# Altium PCB LoRaBaseStation.PcbDoc
Units mm, origin at the board's own origin, x right, y up, seen from the top; angles counter-clockwise.
Board outline 68.45 x 47.24 mm, 2 copper layers (Top Layer, Bottom Layer); 11 components, 5 nets, 93 pads, 24 vias.
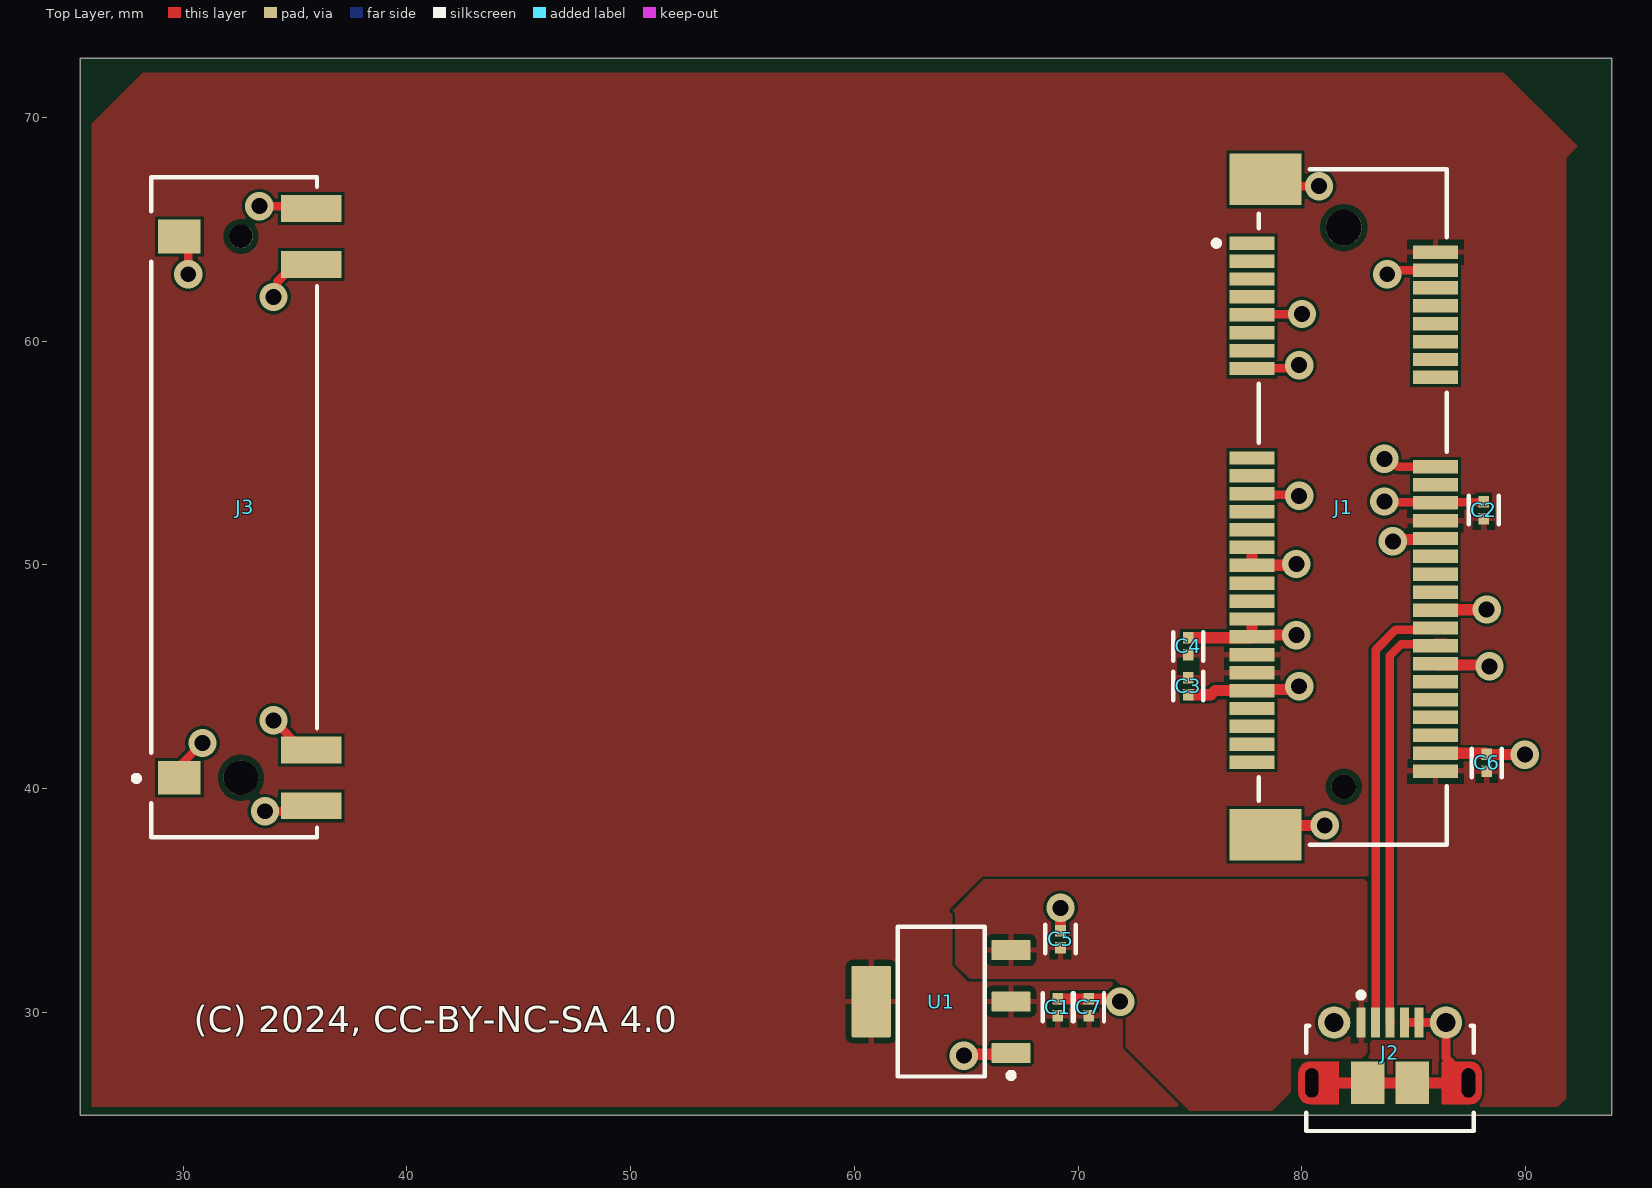
[diagram p0: Top Layer view]
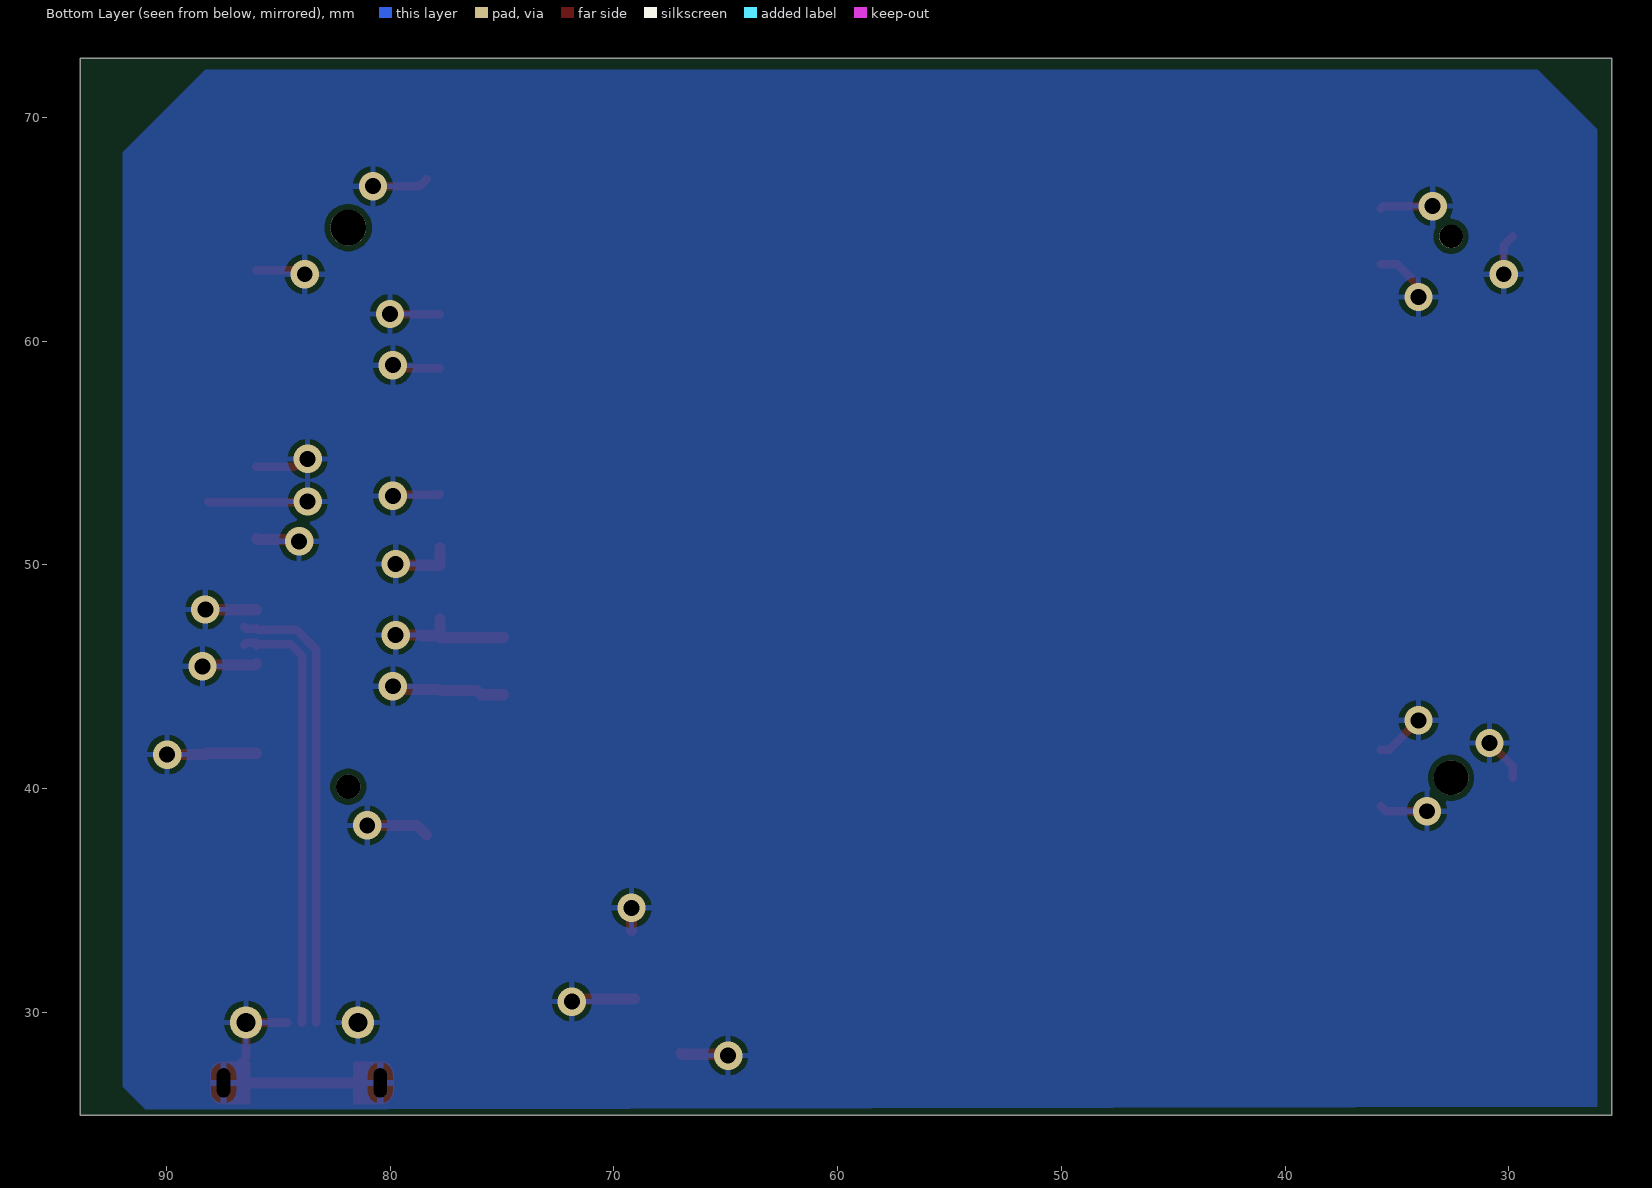
[diagram p1: Bottom Layer view, seen from below]
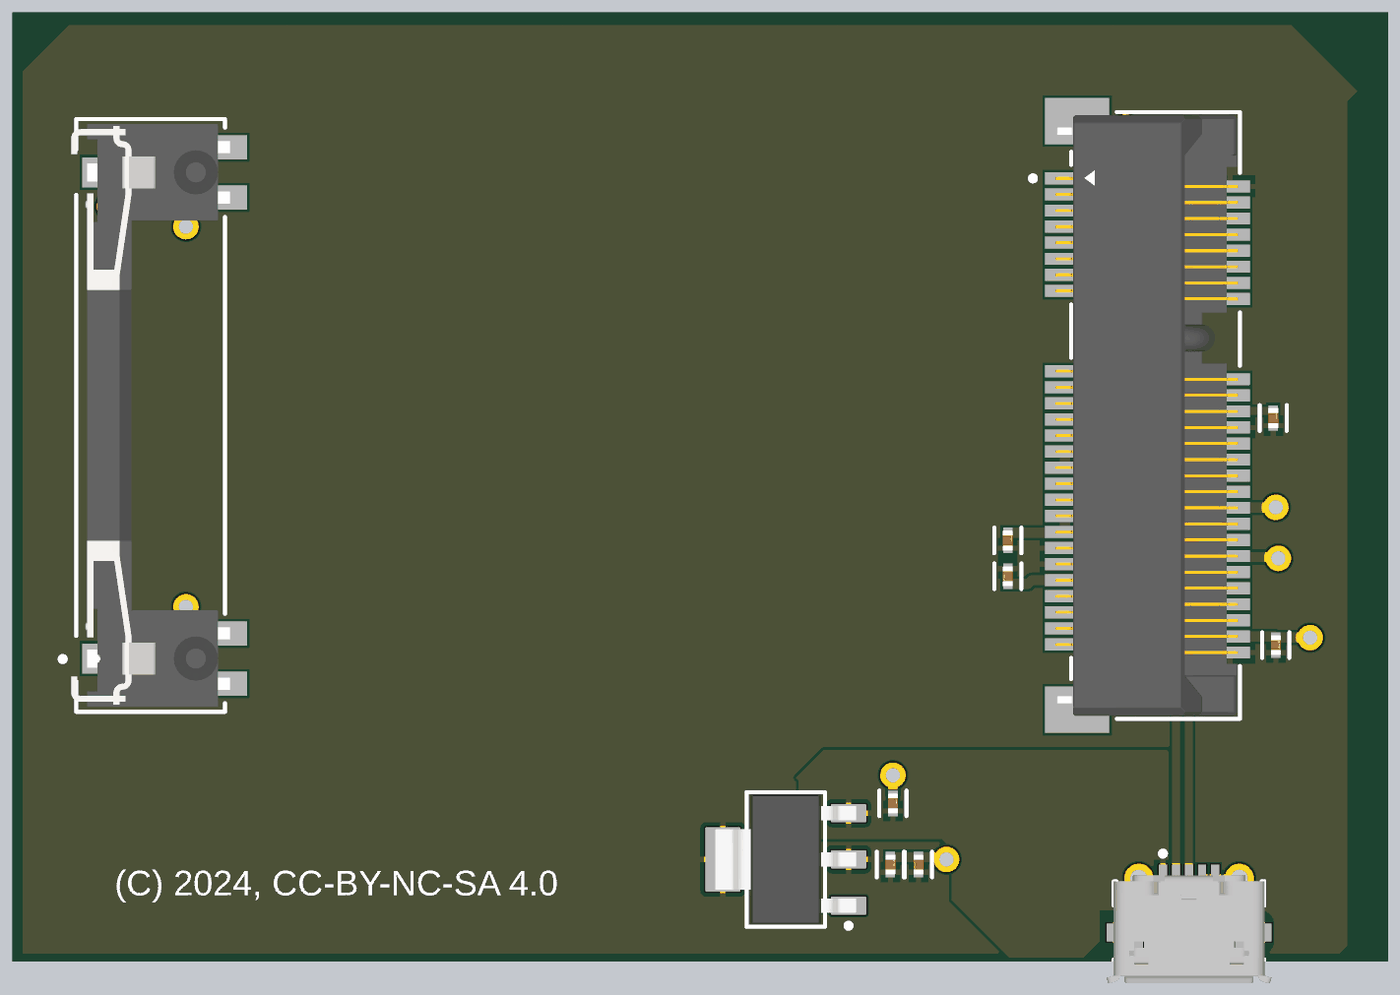
[diagram p2: 3D render of the assembled board from above, using the file's embedded part models]

## Layer stack, top to bottom
Top Solder: solder mask 0.0102, Solder Resist, Dk 3.5
Top Layer: signal copper 0.0356
Dielectric 1: dielectric 0.32, FR-4, Dk 4.8
Bottom Layer: signal copper 0.0356
Bottom Solder: solder mask 0.0102, Solder Resist, Dk 3.5

## Board outline
25.4,25.4 93.853,25.4 93.853,72.644 25.4,72.644

## Design rules (kind name [scope] priority, off if disabled: settings)
BoardOutlineClearance [All] p1 off: gap=0.2 ignorepadtopadclearanceinfootprint=FALSE
Clearance [All] p1: gap=0.127 ignorepadtopadclearanceinfootprint=FALSE except(0.25: Arc-Hole Track-Hole SMDPad-Hole THPad-Hole Via-Hole Fill-Hole Poly-Hole Region-Hole Text-Hole)
DiffPairsRouting [All] p1: maxlimit=0.254 minlimit=0.254 mostfreqgap=0.254 toplayer_minwidth=0.381 toplayer_maxwidth=0.381 toplayer_prefwidth=0.381 bottomlayer_minwidth=0.381 bottomlayer_maxwidth=0.381 bottomlayer_prefwidth=0.381 maxuncoupledlength=12.7
HoleSize [All] p1: absolutevalues=TRUE maxlimit=6.3 minlimit=0.3 maxpercent=80.000 minpercent=20.000
HoleToHoleClearance [All] p1: gap=0.25 allowstackedmicrovias=FALSE
MinimumAnnularRing [All] p1 off: minimumring=0.076
MinimumSolderMaskSliver [All] p1: minsoldermaskwidth=0
PolygonConnect [All] p1: connectstyle=Relief reliefconductorwidth=0.254 reliefentries=4 polygonreliefangle="90 Angle" airgapwidth=0.254
RoutingVias [All] p1: holewidth=0.711 width=1.27 viastyle="Through Hole" minholewidth=0.711 minwidth=1.27 maxholewidth=0.711 maxwidth=1.27
SilkToSilkClearance [All] p1: silktosilkclearance=0
SilkToSolderMaskClearance [IsPad] p1: minsilkscreentomaskgap=0.127 clearancetoexposedcopper=TRUE
SolderMaskExpansion [All] p1: expansion=0.075 istentingtop=FALSE
Width [All] p1: maxlimit=25.4 minlimit=0.127 preferedwidth=0.127 minimp=50.000000 maximp=50.000000 favimp=50.000000
24 further rules are at their usual default settings.

## Classes and differential pairs
differential pair D: +D_P -D_N

## Components (designator, comment, footprint, x,y, rotation, side; value= is the part's Value field where it differs from the comment)
C1 "GRM155R71E104KE14J" FP-GRM155-0_05-IPC_C 69.088,30.226 r90 top
C2 "GRM155R71E104KE14J" FP-GRM155-0_05-IPC_C 88.138,52.451 r90 top
C3 "GRM155R71E104KE14J" FP-GRM155-0_05-IPC_C 74.93,44.577 r270 top
C4 "GRM155R71E104KE14J" FP-GRM155-0_05-IPC_C 74.93,46.355 r90 top
C5 "CL05A105KP5NNNC" FP-CL511-IPC_C 69.215,33.272 r90 top
C6 "CL05A105KP5NNNC" FP-CL511-IPC_C 88.265,41.148 r90 top
C7 "GRM155R71E104KE14J" FP-GRM155-0_05-IPC_C 70.485,30.226 r270 top
J1 "1775862-2" FP-1775862-2-MFG 82.279,52.58 r270 top
J2 "105017-0001" USB-MICRO-B_V 83.947,28.194 r0 top
J3 "MM60-EZH059-B5-R650" FP-MM60-EZH059-B5-R650-MFG 32.279,52.58 r90 top
U1 "TLV1117LV33DCYR" DCY0004A_N 63.881,30.48 r180 top

## Footprints (in the part's own frame and the unit in brackets; to place one, negate y for a bottom-side part, rotate by r counter-clockwise, add the part's x,y. Pads: shape width x height; smd on the part's side, far side on the other; paste and mask are expansions set on the pad)
DCY0004A_N [mm] "SOT223, 4-Leads, Body 6.7x3.7mm, Pitch 2.3mm, IPC Medium Density"
  rrect11% 1.75x0.9 smd: 1(-3.125,2.3) 2(-3.125,0) 3(-3.125,-2.3)
  rrect6% 1.75x3.2 smd: 4(3.125,0)
  silkscreen extent -3.25,-3.35 1.95,3.42, body extent -3.5,-3.25 3.5,3.25, height 1.62
FP-1775862-2-MFG [mm]
  rect 0.6x2 smd paste+0 mask+0: 1(-11.8,-4.5) 2(-11.4,3.7) 3(-11,-4.5) 4(-10.6,3.7) 5(-10.2,-4.5) 6(-9.8,3.7) 7(-9.4,-4.5) 8(-9,3.7) 9(-8.6,-4.5) 10(-8.2,3.7) 11(-7.8,-4.5) 12(-7.4,3.7) 13(-7,-4.5) 14(-6.6,3.7) 15(-6.2,-4.5) 16(-5.8,3.7) 17(-2.2,-4.5) 18(-1.8,3.7) 19(-1.4,-4.5) 20(-1,3.7) 21(-0.6,-4.5) 22(-0.2,3.7) 23(0.2,-4.5) 24(0.6,3.7) 25(1,-4.5) 26(1.4,3.7) 27(1.8,-4.5) 28(2.2,3.7) 29(2.6,-4.5) 30(3,3.7) 31(3.4,-4.5) 32(3.8,3.7) 33(4.2,-4.5) 34(4.6,3.7) 35(5,-4.5) 36(5.4,3.7) 37(5.8,-4.5) 38(6.2,3.7) 39(6.6,-4.5) 40(7,3.7) 41(7.4,-4.5) 42(7.8,3.7) 43(8.2,-4.5) 44(8.6,3.7) 45(9,-4.5) 46(9.4,3.7) 47(9.8,-4.5) 48(10.2,3.7) 49(10.6,-4.5) 50(11,3.7) 51(11.4,-4.5) 52(11.8,3.7)
  rect 2.3x3.2 smd paste+0 mask+0: 53(-14.65,-3.9) 54(14.65,-3.9)
  round 1.6 hole 1.6 unplated paste-2539.97 mask+0: ""(-12.5,-0.4)
  round 1.1 hole 1.1 unplated paste-2539.97 mask+0: ""(12.5,-0.4)
  silkscreen extent -15.1,-6.22 15.1,4.2, body extent -15.9,-5.6 15.9,4.8, height 0.25
FP-CL511-IPC_C [mm]
  rect 0.515x0.472 smd paste+0 mask+0: 1(-0.379,0) 2(0.379,0)
  silkscreen extent -0.64,-0.67 0.64,0.67, body extent -0.74,-0.38 0.74,0.38, height 0.25
FP-GRM155-0_05-IPC_C [mm]
  rect 0.515x0.472 smd paste+0 mask+0: 1(-0.379,0) 2(0.379,0)
  silkscreen extent -0.64,-0.67 0.64,0.67, body extent -0.74,-0.38 0.74,0.38, height 0.25
FP-MM60-EZH059-B5-R650-MFG [mm]
  rect 1.5x1.9 smd paste+0 mask+0: 1(-12.1,2.45) 2(12.1,2.45)
  rect 1.2x2.7 smd paste+0 mask+0: 3(-13.35,-3.45) 4(-10.85,-3.45) 5(10.85,-3.45) 6(13.35,-3.45)
  round 1.55 hole 1.55 unplated paste-2539.97 mask+0: ""(-12.1,-0.3)
  round 1.05 hole 1.05 unplated paste-2539.97 mask+0: ""(12.1,-0.3)
  silkscreen extent -14.75,-3.7 14.75,4.5, body extent -14.85,-4.9 14.85,3.8, height 0.25
USB-MICRO-B_V [mm] "USB, MICRO B, Body 7.491x4.695 mm, Pitch 0.65 mm"
  rect 0.4x1.35 smd: 1(-1.3,1.35) 2(-0.65,1.35) 3(0,1.35) 4(0.65,1.35) 5(1.3,1.35)
  round 1.45 hole 0.85: 6(-2.5,1.35) 7(2.5,1.35)
  rrect50% 0x0 hole 0.6 slot 1.3 at 90 deg: 8(-3.5,-1.35) 11(3.5,-1.35)
  rect 1.5x1.9 smd: 9(-1,-1.35) 10(1,-1.35)
  Top Layer circle w0.5: c-3.6,-1.8 r0.25
  Top Layer circle w0.5: c-3.6,-0.9 r0.25
  Top Layer circle w0.5: c3.6,-1.8 r0.25
  Top Layer circle w0.5: c3.6,-0.9 r0.25
  Top Layer region: -3.6,-1.8 -3.6,-0.9 -4.1,-0.9 -4.1,-1.8
  Top Layer region: 3.6,-0.9 3.6,-1.8 4.1,-1.8 4.1,-0.9
  Top Layer region: 2.3,-0.4 2.3,-2.3 3.6,-2.3 3.6,-0.4
  Top Layer region: -2.3,-2.3 -2.3,-0.4 -3.6,-0.4 -3.6,-2.3
  silkscreen extent -3.75,-3.5 3.75,2.7, body extent -4.1,-3.9 4.1,1.5, height 2.67

## Part data
C1 C2 C3 C4 C7: library part CMP-06035-003995-1, "Chip Multilayer Ceramic Capacitors for General Purpose, 0402, 0.10uF, X7R, 15%, 10%, 25V", Capacitance=100nF, Case Code (Imperial)=0402, Case Code (Metric)=1005, Dielectric=X7R, Max Operating Temperature=125°C, Min Operating Temperature=-55°C, Package Quantity=50000, Resistor Type=Ceramic, Tolerance=10%, Voltage Rating=25V, Case/Package=0402, Height=0.5mm, Length=0.039inch, Mount="Surface Mount", Packaging="Tape and Reel", Termination=SMD/SMT, Thickness=0.022inch, Voltage Rating (DC)=25V, Weight=0.000212oz, Width=0.5mm
C5 C6: library part CMP-13271-001936-1, "Cap Ceramic 1uF 10V X5R ±10% SMD 0402 +85°C Paper T/R", Capacitance=1uF, Case Code (Imperial)=0402, Case Code (Metric)=1005, Dielectric=X5R, Max Operating Temperature=85°C, Min Operating Temperature=-55°C, Package Quantity=1, Tolerance=10%, Voltage Rating=10V, Case/Package=0402, Contact Plating=Tin, Depth=0.5mm, Height=0.5mm, Length=1mm, Material=Ceramic, Mount="Surface Mount", Packaging="Tape and Reel", Radiation Hardening=No, Thickness=0.022inch, Width=0.02inch
J1: library part CMP-03365-000003-1, "CONN PCI EXP MINI FEMALE 52POS", Flammability Rating="UL94 V-0", High Temperature Housing=Yes, Housing Color=Black, Package Quantity=550, Connector Type=Receptacle, Contact Material="Copper Alloy", Contact Plating=Gold, ELV=Compliant, Housing Material=Thermoplastic, Lead Free="Contains Lead", Mount="Surface Mount", Number of Contacts=52, Number of Positions=52, Number of Rows=2, Orientation="Right Angle", Packaging="Tape and Reel", PCB Mount Retention=Without, PCB Mounting Orientation=Horizontal, Pitch=0.8mm, Radiation Hardening=No, RoHS Compliant=Yes, Row Spacing=0.031inch, Stack Height=5.2mm, Stackable=No, Termination=Solder
J2: library part CMP-2000-05827-1, "Micro-USB B Receptacle, Right Angle, Bottom Mount, Surface Mount, with Solder Tabs, -30 to 85 degC, 5-Pin USB, RoHS, Tape and Reel", Manufacturer=Molex, Package Description="5-Leads USB, Micro B, Body 7.5 x 5 mm, Pitch 0.65 mm", Package Reference=MICRO-B, Package Version="Rev. F, 12/2012", Standard Package=1, Voltage - Max=30V, 3D Model=105017-0001.stp, Catalog Drawings=1050170001, Category=Connectors,Interconnects, Circuits=5, Connector Type=USB-microB, Datasheet URL=http://www.molex.com/elqNow/elqRedir.htm?ref=http://www.molex.com/webdocs/datasheets/pdf/en-us/1050170001_IO_CONNECTORS.pdf, Datasheet Version=03/2016, Family=USB,DVI,HDMIConnectors, Featured Product=Micro-USBConnectorsUSBConnectors, Features=Shielded,SolderRetention, Gender=Receptacle, Ingress Protection=-, Manufacturer URL=http://www.molex.com/, Mating Products=WM17145-ND-CABLEMICROUSBBTOSTDA1.0MWM17147-ND-CABLEMICROUSBBTOSTDA2.0MWM17146-ND-CABLEMICROUSBBTOSTDA1.5M, Mounting Technology=SurfaceMount, Mounting Type=BoardCutout,SurfaceMount,RightAngle, Number of Contacts=5, Online Catalog=Molex-MicroUSB, Other Names=WM1399DKR, Package URL=http://www.molex.com/pdm_docs/sd/1050170001_sd.pdf, Packaging=Digi-Reel®, PCN Assembly/Origin=ResinSupplier21/Oct/2015, RoHS Information=1050170001CertofCompliance, Series=-, Specifications=-
J3: library part CMP-19043-000001-1, "CONN MINI EXPRESS CARD LATCH SMD", Case/Package=SMD/SMT, Contact Resistance=55mR, Current Rating=500mA, Flammability Rating="UL94 V-0", Max Operating Temperature=80°C, Min Operating Temperature=-40°C, Package Quantity=1, Contact Material="Stainless Steel", Contact Plating=Tin, Height=5.9mm, Mating Cycles=50, Mount=Socket, Packaging="Tape and Reel", RoHS Compliant=Yes, Series=MM60, Termination=Solder
U1: library part CMP-0395-00503-2, "Single Output LDO, 1 A, Fixed 3.3 V Output, 2 to 5.5 V Input, 4-pin SOT-223 (DCY), -40 to 125 degC, Green (RoHS & no Sb/Br)", Manufacturer="Texas Instruments", Accuracy(%)=2, Code_JEDEC=TO-261, ComponentLink1Description="Manufacturer URL", ComponentLink1URL=http://www.ti.com/, ComponentLink2Description=Datasheet, ComponentLink2URL=http://www.ti.com/general/docs/lit/getliterature.tsp?genericPartNumber=TLV1117LV33&fileType=pdf, ComponentLink3Description="Package Specification", ComponentLink3URL=http://www.ti.com/litv/pdf/mpds094a, DatasheetVersion=SBVS160A, Eco-Plan="Green (RoHS & no Sb/Br)", Fixed Output Options(V)=3.3, Iout(Max)(A)=1, Iq(Typ)(mA)=0.05, Mounting Technology="Surface Mount", PackageDescription="4-Pin Plastic Small Outline, Body 3.5 x 6.5 mm, Pitch 2.3 mm", PackageReference=DCY0004A, PackageVersion=4202506/B, PartNumber=TLV1117LV33DCYR, SubFamily="Single Channel LDO", Vdo(Typ)(mV)=1200, Vin(Max)(V)=5.5, Vin(Min)(V)=2, Vout Adj(Max)(V)=3.3, Vout Adj(Min)(V)=3.3

## Via types
v1: diameter 1.27, hole 0.711, Top Layer to Bottom Layer, 24 vias

## Nets (pads, with @x,y where several pads share a name; then routed paths per layer and width w, separated by ;. In a path a pad name is that pad's centre, name@x,y a point inside that pad or via, vN(x,y) a via of type N, cw(c..) or ccw(c..) an arc to the next point about the centre after c; other vN are vias at no path point)
3V3: C1.1 C2.1 C3.1 C4.1 C6.1 C7.2 J1.2 J1.24 J1.39 J1.41 J1.52 U1.2 U1.4
D_N: J1.36 J2.2 | length 20.3
  Top Layer w0.381: J2.2 83.305,29.551 83.305,46.207 84.195,47.097 85.896,47.097 J1.36 ; J1.36@85.979,47.149 86.44,47.149 J1.36@86.523,47.232
D_P: J1.38 J2.3 | length 19.3
  Top Layer w0.381: J2.3 83.94,29.552 83.94,45.944 84.458,46.462 85.897,46.462 J1.38 ; J1.38@85.979,46.514 86.441,46.514 J1.38@86.523,46.432
GND: C1.2 C2.2 C3.2 C4.2 C5.2 C6.2 C7.1 J1.4 J1.9 J1.15 J1.18 J1.21 J1.22 J1.26 J1.27 J1.29 J1.34 J1.35 J1.37 J1.40 J1.43 J1.50 J1.53 J1.54 J2.4 J2.5 J2.6 J2.7 J2.8 J2.9 J2.10 J2.11 J3.1 J3.2 J3.3 J3.4 J3.5 J3.6 U1.1 | length 76.6
  Top Layer w0.381: J3.1 29.829,41.005 v1(30.861,42.037) ; J3.2 30.226,64.283 v1(30.226,62.992) ; v1(33.401,66.04) 35.619,66.04 J3.6 ; v1(33.655,38.989) 35.488,38.989 J3.3 ; v1(34.036,43.053) 35.359,41.73 J3.4 ; v1(34.036,61.976) 34.206,62.146 34.206,62.657 34.979,63.43 J3.5 ; J1.21 77.826,53.133 79.836,53.133 v1(79.883,53.086) ; J1.15 79.735,58.78 v1(79.883,58.928) ; J1.9 77.796,61.197 79.993,61.197 v1(80.01,61.214) ; J1.53 78.68,66.929 v1(80.772,66.929) ; v1(83.693,52.832) 83.719,52.806 85.953,52.806 J1.22 86.004,52.805 88.113,52.805 C2.2 ; v1(83.693,54.737) 83.934,54.737 84.291,54.38 J1.18 ; v1(83.82,62.992) 84.008,63.18 J1.4 ; J2.4 J2.5 J2.7 86.447,27.967 87.447,26.967 J2.11
  Top Layer w0.5: v1(64.897,28.067) 64.953,28.123 66.95,28.123 U1.1 ; C1.2 69.096,30.597 71.765,30.597 v1(71.882,30.48) ; C5.2 v1(69.215,34.671) ; C3.2 75.948,44.198 76.13,44.38 J1.43 77.829,44.43 79.736,44.43 v1(79.883,44.577) ; C4.2 74.938,46.741 77.74,46.741 J1.37 ; J1.35 J1.37 ; J1.27 J1.29 79.698,49.98 v1(79.756,50.038) ; J1.54 78.803,38.354 v1(81.026,38.354) ; v1(79.756,46.863) 78.662,46.863 78.629,46.83 77.829,46.83 J1.37 ; J2.8 J2.9 J2.10 J2.11 ; v1(84.074,51.054) 84.15,51.13 85.929,51.13 J1.26 ; J1.50 88.205,41.58 88.259,41.527 C6.2 89.964,41.527 v1(89.973,41.518) ; J1.40 86.029,45.53 88.328,45.53 v1(88.392,45.466) ; J1.34 85.992,47.993 88.252,47.993 v1(88.265,48.006)
Vbus: C5.1 J2.1 U1.3
pads on no net: J1. J1.1 J1.3 J1.5 J1.6 J1.7 J1.8 J1.10 J1.11 J1.12 J1.13 J1.14 J1.16 J1.17 J1.19 J1.20 J1.23 J1.25 J1.28 J1.30 J1.31 J1.32 J1.33 J1.42 J1.44 J1.45 J1.46 J1.47 J1.48 J1.49 J1.51 J3.

## Polygon pours and split planes (outlines as drawn)
3V3 on Top Layer "3V3_L01_P002" (solid, pour order 2): 25.908,25.781 25.908,69.723 28.194,72.009 89.027,72.009 92.329,68.707 91.821,68.199 91.821,26.162 91.44,25.781
Vbus on Top Layer "VBUS_L01_P000" (solid, pour order 0): 82.804,35.941 82.931,35.814 82.931,28.194 82.677,27.94 79.502,27.94 79.502,26.416 78.613,25.527 75.057,25.527 72.136,28.448 72.136,30.988 71.628,31.496 65.151,31.496 64.516,32.131 64.516,34.417 64.389,34.544 65.786,35.941 66.421,35.941
GND on Bottom Layer "GND_L02_P001" (solid, pour order 1): 26.035,25.781 26.035,69.469 28.702,72.136 88.265,72.136 91.948,68.453 91.948,26.67 90.932,25.654

## Silkscreen, mask and mechanical layers (free items; w line width, h text height)
Top Overlay:
  text "(C) 2024, CC-BY-NC-SA 4.0" at 30.48,28.697 h2

## Text inside footprints (layer, text, board x,y; h text height)
J2: Mechanical 1 "PCB EDGE" at 76.747,25.294 h0.3